# Altium PCB esp32-childboard-PCB-ERC.PcbDoc
Units mm, origin at the board's own origin, x right, y up, seen from the top; angles counter-clockwise.
Board outline 130.34 x 104.38 mm, 2 copper layers (Top Layer, Bottom Layer); 68 components, 74 nets, 260 pads, 0 vias.
Unrouted connection lines stored in the file: 99.
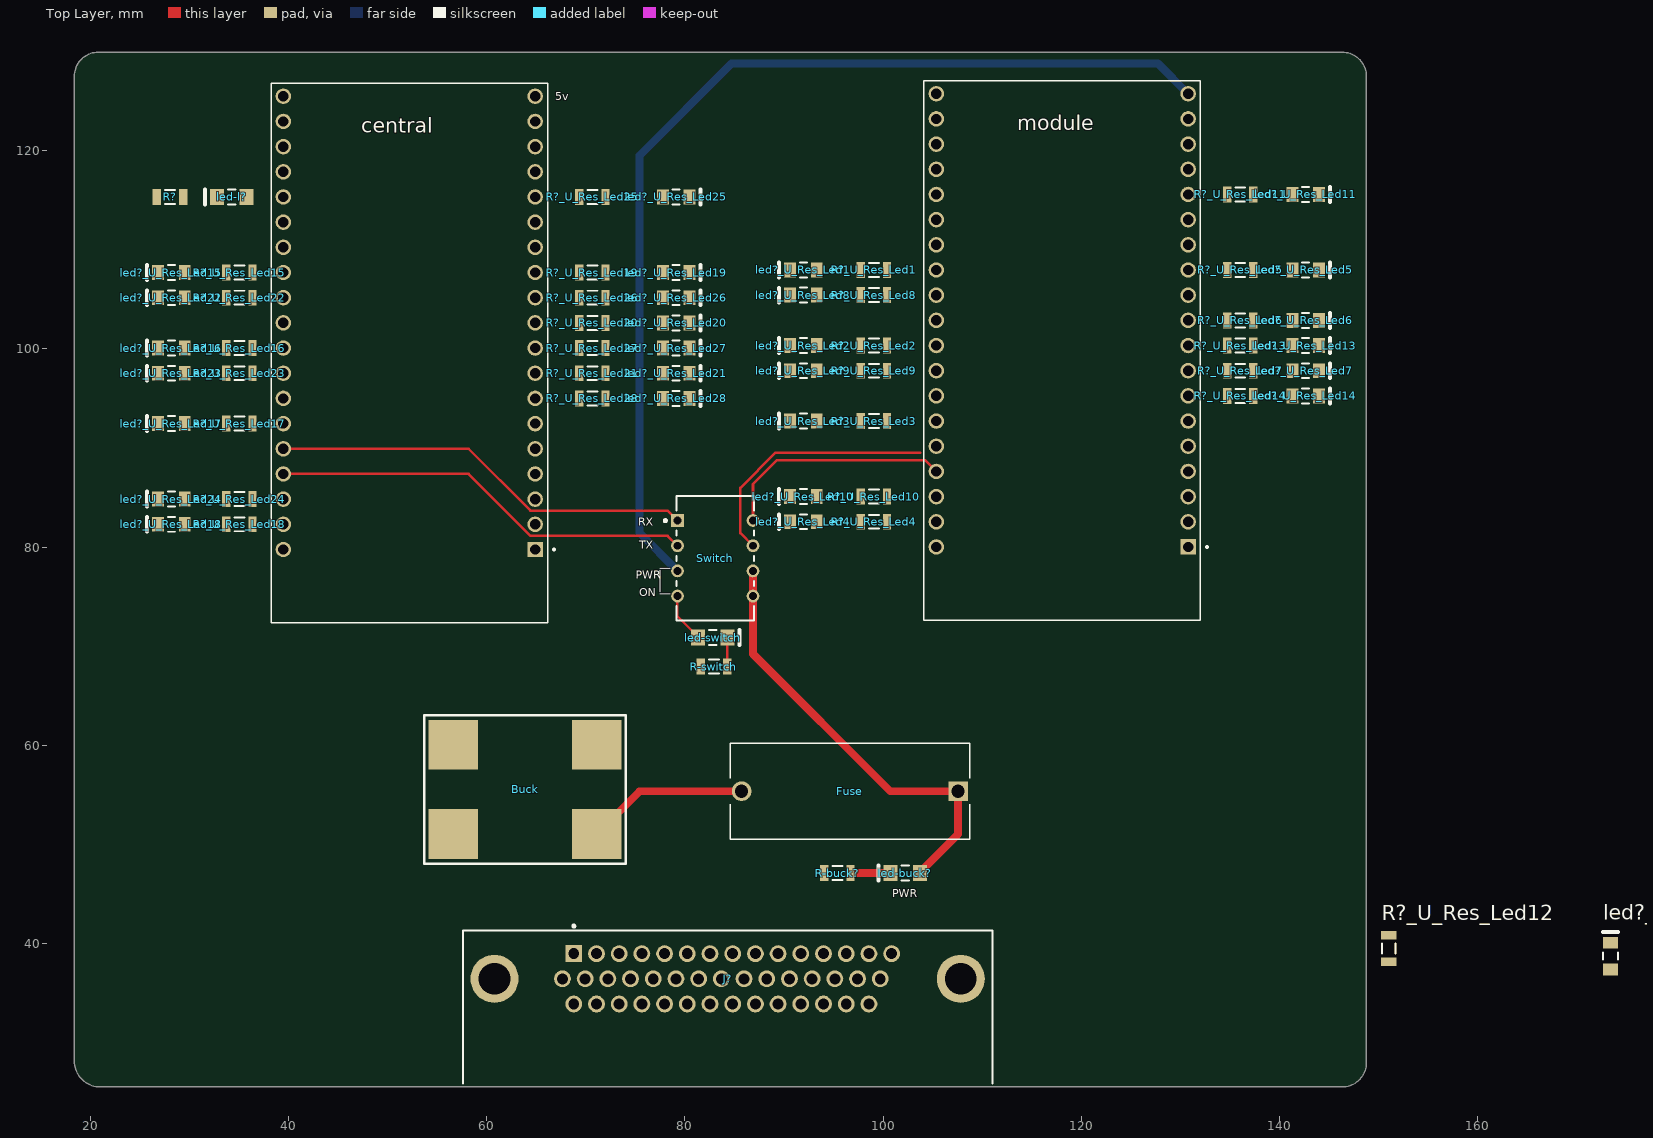
[diagram p0: Top Layer view]
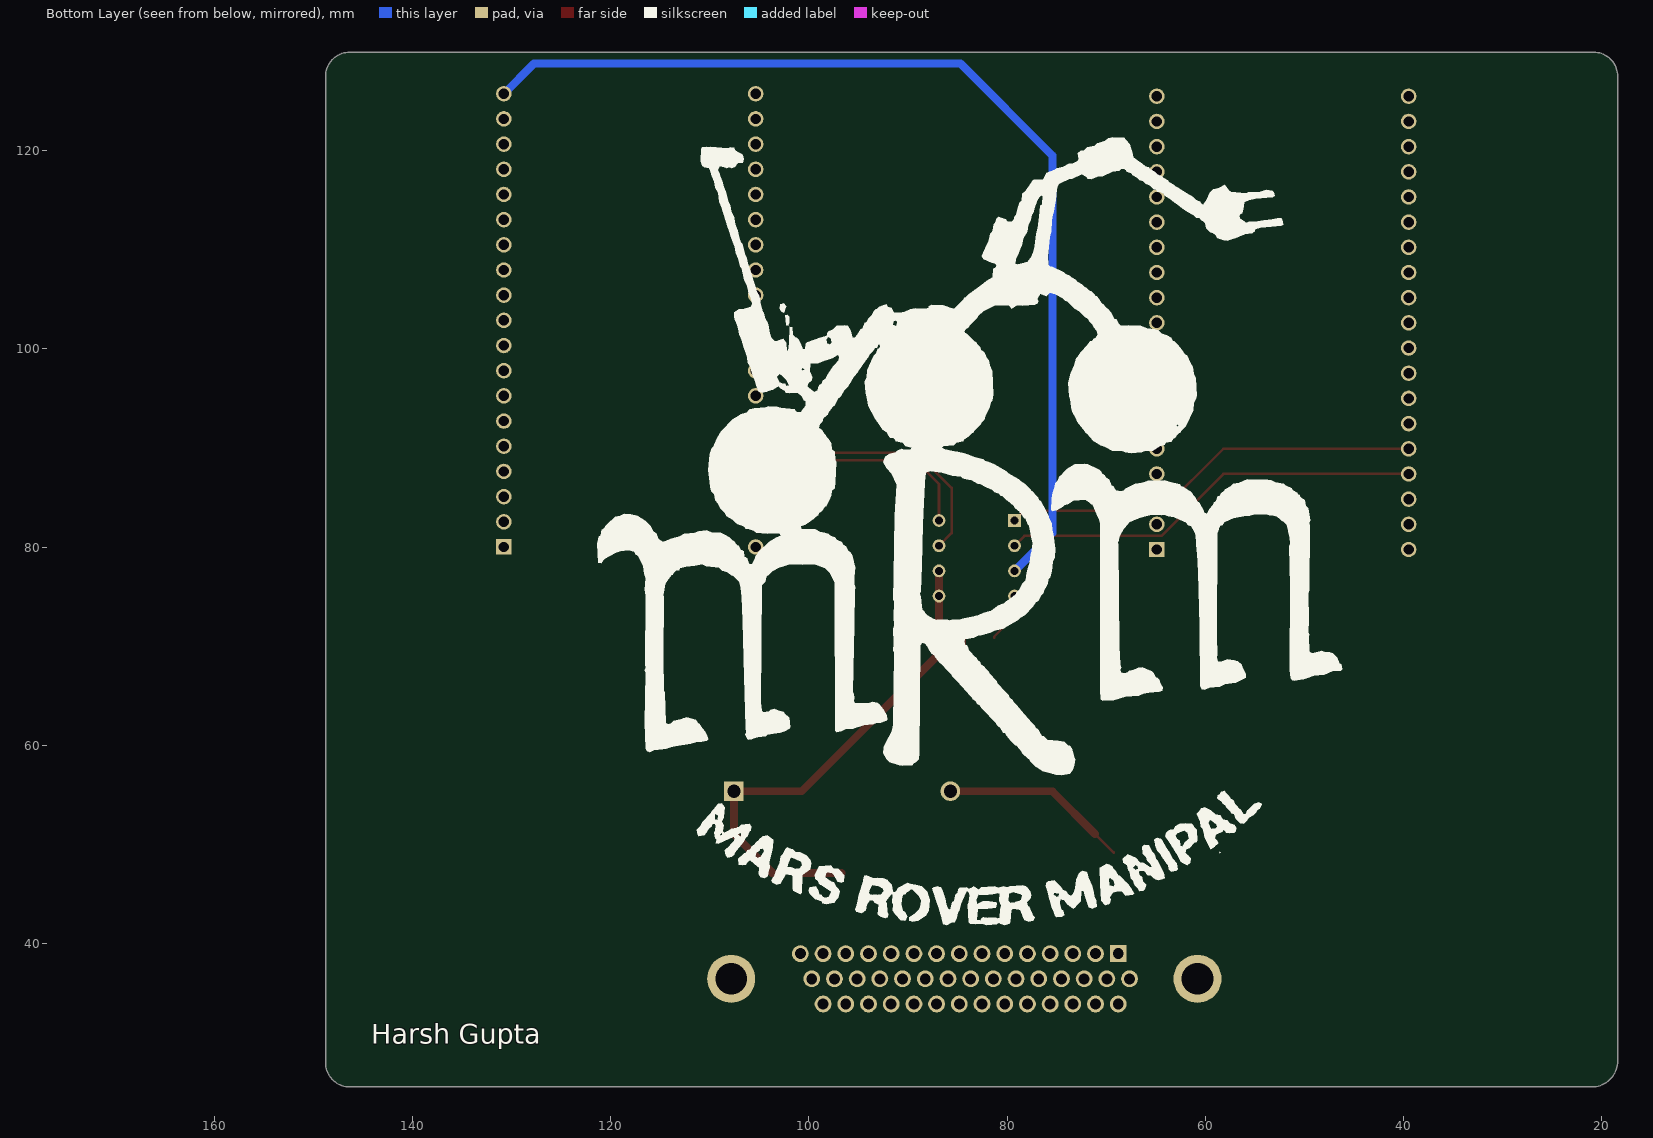
[diagram p1: Bottom Layer view, seen from below]

## Layer stack, top to bottom
Top Solder: solder mask 0.0102, Solder Resist, Dk 3.5
Top Layer: signal copper 0.009
Dielectric 1: dielectric 0.32, FR-4, Dk 4.8
Bottom Layer: signal copper 0.009
Bottom Solder: solder mask 0.0102, Solder Resist, Dk 3.5

## Board outline
18.411,28.147 18.394,127.502 18.409,127.502 cw(c20.828,127.502) 20.828,129.921 146.32,129.921 cw(c146.32,127.502) 148.738,127.502 148.738,27.961 cw(c146.32,27.961) 146.32,25.543 21.015,25.543 cw(c21.015,28.147)

## Design rules (kind name [scope] priority, off if disabled: settings)
Clearance [All] p1: gap=0.254 ignorepadtopadclearanceinfootprint=FALSE
PolygonConnect [All] p1: connectstyle=Relief reliefconductorwidth=0.254 reliefentries=4 polygonreliefangle="90 Angle" airgapwidth=0.254
RoutingVias [All] p1: holewidth=0.711 width=1.27 viastyle="Through Hole" minholewidth=0.711 minwidth=1.27 maxholewidth=0.711 maxwidth=1.27
SolderMaskExpansion [All] p1: expansion=0.102 istentingtop=FALSE
SupplyNets "Schematic Supply Nets" [InNet('GND')] p1: voltage=0.000
Width [All] p1: maxlimit=0.8 minlimit=0.254 preferedwidth=0.254
30 further rules are at their usual default settings.

## Classes and differential pairs
component class 2esp-erc-schematic: Buck Central Fuse J? led-buck? led-l? led-switch module R-buck? R-switch Switch

## Components (designator, comment, footprint, x,y, rotation, side; value= is the part's Value field where it differs from the comment)
Buck "Microbuck" "Micro buck" 63.87,55.554 r90 top
central "ESP32-DEVKITC-32D" MODULE_ESP32-DEVKITC-32D 52.197,99.516 r180 top (schematic designator Central)
Fuse "4527" FUSE_4527 96.647,55.372 r180 top
J? "L717HDB44PD1CH4F" FP-L717HDB44PD1CH4F-MFG 84.31,30.069 r0 top
led-buck? "597-3311-407F" DIAL-597-3311-407F_V 102.235,47.117 r180 top
led-l? "PG1102W-TR" STEC-1102W_V 34.29,115.316 r180 top
led-switch "597-3311-407F" DIAL-597-3311-407F_V 82.804,70.866 r0 top
led?_U_Res_Led1 "SML-LX1206YC-TR" LUMX-SML-LX1206YC-TR_V 91.948,107.95 r180 top
led?_U_Res_Led2 "SML-LX1206YC-TR" LUMX-SML-LX1206YC-TR_V 91.948,100.33 r180 top
led?_U_Res_Led3 "SML-LX1206YC-TR" LUMX-SML-LX1206YC-TR_V 91.948,92.71 r180 top
led?_U_Res_Led4 "SML-LX1206YC-TR" LUMX-SML-LX1206YC-TR_V 91.948,82.55 r180 top
led?_U_Res_Led5 "SML-LX1206YC-TR" LUMX-SML-LX1206YC-TR_V 142.621,107.95 r0 top
led?_U_Res_Led6 "SML-LX1206YC-TR" LUMX-SML-LX1206YC-TR_V 142.621,102.87 r0 top
led?_U_Res_Led7 "SML-LX1206YC-TR" LUMX-SML-LX1206YC-TR_V 142.621,97.79 r0 top
led?_U_Res_Led8 "SML-LX1206YC-TR" LUMX-SML-LX1206YC-TR_V 91.948,105.41 r180 top
led?_U_Res_Led9 "SML-LX1206YC-TR" LUMX-SML-LX1206YC-TR_V 91.948,97.79 r180 top
led?_U_Res_Led10 "SML-LX1206YC-TR" LUMX-SML-LX1206YC-TR_V 91.948,85.09 r180 top
led?_U_Res_Led11 "SML-LX1206YC-TR" LUMX-SML-LX1206YC-TR_V 142.621,115.57 r0 top
led?_U_Res_Led12 "SML-LX1206YC-TR" LUMX-SML-LX1206YC-TR_V 173.355,38.735 r90 top
led?_U_Res_Led13 "SML-LX1206YC-TR" LUMX-SML-LX1206YC-TR_V 142.621,100.33 r0 top
led?_U_Res_Led14 "SML-LX1206YC-TR" LUMX-SML-LX1206YC-TR_V 142.621,95.25 r0 top
led?_U_Res_Led15 "SML-LX1206YC-TR" LUMX-SML-LX1206YC-TR_V 28.194,107.696 r180 top
led?_U_Res_Led16 "SML-LX1206YC-TR" LUMX-SML-LX1206YC-TR_V 28.194,100.076 r180 top
led?_U_Res_Led17 "SML-LX1206YC-TR" LUMX-SML-LX1206YC-TR_V 28.194,92.456 r180 top
led?_U_Res_Led18 "SML-LX1206YC-TR" LUMX-SML-LX1206YC-TR_V 28.194,82.296 r180 top
led?_U_Res_Led19 "SML-LX1206YC-TR" LUMX-SML-LX1206YC-TR_V 79.121,107.696 r0 top
led?_U_Res_Led20 "SML-LX1206YC-TR" LUMX-SML-LX1206YC-TR_V 79.121,102.616 r0 top
led?_U_Res_Led21 "SML-LX1206YC-TR" LUMX-SML-LX1206YC-TR_V 79.121,97.536 r0 top
led?_U_Res_Led22 "SML-LX1206YC-TR" LUMX-SML-LX1206YC-TR_V 28.194,105.156 r180 top
led?_U_Res_Led23 "SML-LX1206YC-TR" LUMX-SML-LX1206YC-TR_V 28.194,97.536 r180 top
led?_U_Res_Led24 "SML-LX1206YC-TR" LUMX-SML-LX1206YC-TR_V 28.194,84.836 r180 top
led?_U_Res_Led25 "SML-LX1206YC-TR" LUMX-SML-LX1206YC-TR_V 79.121,115.316 r0 top
led?_U_Res_Led26 "SML-LX1206YC-TR" LUMX-SML-LX1206YC-TR_V 79.121,105.156 r0 top
led?_U_Res_Led27 "SML-LX1206YC-TR" LUMX-SML-LX1206YC-TR_V 79.121,100.076 r0 top
led?_U_Res_Led28 "SML-LX1206YC-TR" LUMX-SML-LX1206YC-TR_V 79.121,94.996 r0 top
module "ESP32-DEVKITC-32D" MODULE_ESP32-DEVKITC-32D 118.059,99.77 r180 top
R-buck? "RC1206FR-07120RL" RESC3116X65X40LL10T20 95.377,47.117 r180 top
R-switch "RC1206FR-07120RL" RESC3116X65X40LL10T20 82.931,67.945 r0 top
R? "RC1206FR-07120RL" RESC3116X65X40LL10T20 28.067,115.316 r0 top
R?_U_Res_Led1 "RC1206FR-07120RL" RESC3116X65X40LL10T20 99.06,107.95 r180 top
R?_U_Res_Led2 "RC1206FR-07120RL" RESC3116X65X40LL10T20 99.06,100.33 r180 top
R?_U_Res_Led3 "RC1206FR-07120RL" RESC3116X65X40LL10T20 99.06,92.71 r180 top
R?_U_Res_Led4 "RC1206FR-07120RL" RESC3116X65X40LL10T20 99.06,82.55 r180 top
R?_U_Res_Led5 "RC1206FR-07120RL" RESC3116X65X40LL10T20 136.017,107.95 r0 top
R?_U_Res_Led6 "RC1206FR-07120RL" RESC3116X65X40LL10T20 136.017,102.87 r0 top
R?_U_Res_Led7 "RC1206FR-07120RL" RESC3116X65X40LL10T20 136.017,97.79 r0 top
R?_U_Res_Led8 "RC1206FR-07120RL" RESC3116X65X40LL10T20 99.06,105.41 r180 top
R?_U_Res_Led9 "RC1206FR-07120RL" RESC3116X65X40LL10T20 99.06,97.79 r180 top
R?_U_Res_Led10 "RC1206FR-07120RL" RESC3116X65X40LL10T20 99.06,85.09 r180 top
R?_U_Res_Led11 "RC1206FR-07120RL" RESC3116X65X40LL10T20 136.017,115.57 r0 top
R?_U_Res_Led12 "RC1206FR-07120RL" RESC3116X65X40LL10T20 151.003,39.497 r90 top
R?_U_Res_Led13 "RC1206FR-07120RL" RESC3116X65X40LL10T20 136.017,100.33 r0 top
R?_U_Res_Led14 "RC1206FR-07120RL" RESC3116X65X40LL10T20 136.017,95.25 r0 top
R?_U_Res_Led15 "RC1206FR-07120RL" RESC3116X65X40LL10T20 35.052,107.696 r180 top
R?_U_Res_Led16 "RC1206FR-07120RL" RESC3116X65X40LL10T20 35.052,100.076 r180 top
R?_U_Res_Led17 "RC1206FR-07120RL" RESC3116X65X40LL10T20 35.052,92.456 r180 top
R?_U_Res_Led18 "RC1206FR-07120RL" RESC3116X65X40LL10T20 35.052,82.296 r180 top
R?_U_Res_Led19 "RC1206FR-07120RL" RESC3116X65X40LL10T20 70.667,107.696 r0 top
R?_U_Res_Led20 "RC1206FR-07120RL" RESC3116X65X40LL10T20 70.667,102.616 r0 top
R?_U_Res_Led21 "RC1206FR-07120RL" RESC3116X65X40LL10T20 70.667,97.536 r0 top
R?_U_Res_Led22 "RC1206FR-07120RL" RESC3116X65X40LL10T20 35.052,105.156 r180 top
R?_U_Res_Led23 "RC1206FR-07120RL" RESC3116X65X40LL10T20 35.052,97.536 r180 top
R?_U_Res_Led24 "RC1206FR-07120RL" RESC3116X65X40LL10T20 35.052,84.836 r180 top
R?_U_Res_Led25 "RC1206FR-07120RL" RESC3116X65X40LL10T20 70.667,115.316 r0 top
R?_U_Res_Led26 "RC1206FR-07120RL" RESC3116X65X40LL10T20 70.667,105.156 r0 top
R?_U_Res_Led27 "RC1206FR-07120RL" RESC3116X65X40LL10T20 70.667,100.076 r0 top
R?_U_Res_Led28 "RC1206FR-07120RL" RESC3116X65X40LL10T20 70.667,94.996 r0 top
Switch "1825360-3" FP-1825360-3-MFG 83.058,78.867 r270 top

## Footprints (in the part's own frame and the unit in brackets; to place one, negate y for a bottom-side part, rotate by r counter-clockwise, add the part's x,y. Pads: shape width x height; smd on the part's side, far side on the other; paste and mask are expansions set on the pad)
DIAL-597-3311-407F_V [mm] "SMD, 2-Leads, Body 1.5x3mm"
  rect 1.42x1.6 smd: 1(-1.49,0) 2(1.49,0)
  silkscreen extent -0.38,-0.75 2.7,0.75, body extent -1.5,-0.75 1.5,0.75, height 1.5
FP-1825360-3-MFG [mm]
  rect 1.29x1.29 hole 0.79 paste-2539.97 mask+0: 1(-3.81,-3.81)
  round 1.29 hole 0.79 paste-2539.97 mask+0: 2(-1.27,-3.81) 3(1.27,-3.81) 4(3.81,-3.81) 5(3.81,3.81) 6(1.27,3.81) 7(-1.27,3.81) 8(-3.81,3.81)
  silkscreen extent -6.29,-5.16 6.29,3.9, body extent -6.4,-4.55 6.4,4.55, height 0.25
FP-L717HDB44PD1CH4F-MFG [mm]
  rect 1.7x1.7 hole 1.1 paste-2539.97 mask+0: 1(-15.52,8.92)
  round 1.7 hole 1.1 paste-2539.97 mask+0: 2(-13.23,8.92) 3(-10.94,8.92) 4(-8.65,8.92) 5(-6.36,8.92) 6(-4.07,8.92) 7(-1.78,8.92) 8(0.51,8.92) 9(2.8,8.92) 10(5.09,8.92) 11(7.38,8.92) 12(9.67,8.92) 13(11.96,8.92) 14(14.25,8.92) 15(16.54,8.92) 16(-16.665,6.38) 17(-14.375,6.38) 18(-12.085,6.38) 19(-9.795,6.38) 20(-7.505,6.38) 21(-5.215,6.38) 22(-2.925,6.38) 23(-0.635,6.38) 24(1.655,6.38) 25(3.945,6.38) 26(6.235,6.38) 27(8.525,6.38) 28(10.815,6.38) 29(13.105,6.38) 30(15.395,6.38) 31(-15.52,3.84) 32(-13.23,3.84) 33(-10.94,3.84) 34(-8.65,3.84) 35(-6.36,3.84) 36(-4.07,3.84) 37(-1.78,3.84) 38(0.51,3.84) 39(2.8,3.84) 40(5.09,3.84) 41(7.38,3.84) 42(9.67,3.84) 43(11.96,3.84) 44(14.25,3.84)
  round 4.85 hole 3.2 paste-2539.97 mask+0: 45(-23.52,6.38) 46(23.52,6.38)
  silkscreen extent -26.71,-4.2 26.71,11.82, body extent -26.81,-11.34 26.81,11.34, height 0.25
FUSE_4527 [mm]
  rect 1.98x1.98 hole 1.32: 1(-10.92,0)
  round 1.98 hole 1.32: 2(10.92,0)
  silkscreen extent -12.08,-4.85 12.08,4.85
LUMX-SML-LX1206YC-TR_V [mm] "SMD, 2-Leads, Body 3.2x1.5mm"
  rect 1.2x1.5 smd: 1(-1.35,0) 2(1.35,0)
  silkscreen extent -0.35,-0.75 2.45,0.75, body extent -1.6,-0.75 1.6,0.75, height 1.25
"Micro buck" [mm]
  rect 5x5 smd: 1(-4.5,7.25) 2(4.5,7.25) 3(-4.5,-7.25) 4(4.5,-7.25)
  silkscreen extent -7.5,-10.16 7.5,10.16
MODULE_ESP32-DEVKITC-32D [mm]
  rect 1.56x1.56 / inner round 1.56 / far side rect 1.56x1.56 hole 1.04: J2-1(-12.7,19.76)
  round 1.56 hole 1.04: J2-2(-12.7,17.22) J2-3(-12.7,14.68) J2-4(-12.7,12.14) J2-5(-12.7,9.6) J2-6(-12.7,7.06) J2-7(-12.7,4.52) J2-8(-12.7,1.98) J2-9(-12.7,-0.56) J2-10(-12.7,-3.1) J2-11(-12.7,-5.64) J2-12(-12.7,-8.18) J2-13(-12.7,-10.72) J2-14(-12.7,-13.26) J2-15(-12.7,-15.8) J2-16(-12.7,-18.34) J2-17(-12.7,-20.88) J2-18(-12.7,-23.42) J2-19(-12.7,-25.96) J3-1(12.7,19.76) J3-2(12.7,17.22) J3-3(12.7,14.68) J3-4(12.7,12.14) J3-5(12.7,9.6) J3-6(12.7,7.06) J3-7(12.7,4.52) J3-8(12.7,1.98) J3-9(12.7,-0.56) J3-10(12.7,-3.1) J3-11(12.7,-5.64) J3-12(12.7,-8.18) J3-13(12.7,-10.72) J3-14(12.7,-13.26) J3-15(12.7,-15.8) J3-16(12.7,-18.34) J3-17(12.7,-20.88) J3-18(12.7,-23.42) J3-19(12.7,-25.96)
  silkscreen extent -14.7,-27.25 13.95,27.15, body extent -13.97,-27.9 13.97,27.2, height 6.69
RESC3116X65X40LL10T20 [mm] "Chip Resistor, 2-Leads, Body 3.10x1.60mm, IPC High Density"
  rect 0.85x1.6 smd: 1(-1.325,0) 2(1.325,0)
  silkscreen extent -0.5,-0.7 0.5,0.7, body extent -1.6,-0.85 1.6,0.85, height 0.65
STEC-1102W_V [mm] "SMD, 2-Leads, Body 3x1.5mm"
  rect 1.4x1.6 smd: 1(-1.5,0) 2(1.5,0)
  silkscreen extent -0.4,-0.75 2.7,0.75, body extent -1.5,-0.75 1.5,0.75, height 1.78

## Part data
Buck: library part microbuck
central module: "WiFi Development Tools (802.11) ESP32 General Development Kit, ESP32-WROOM-32D on the board", Package=None, Check_prices=https://www.snapeda.com/parts/ESP32-DEVKITC-32D/Espressif+Systems/view-part/?ref=eda, MF="Espressif Systems", MP=ESP32-DEVKITC-32D, SnapEDA_Link=https://www.snapeda.com/parts/ESP32-DEVKITC-32D/Espressif+Systems/view-part/?ref=snap
Fuse: "Fuseholder; 5 A; 250 V; Nylon; Base only; Brass, Tin Plate (Contact)", Package=None, Availability=Unavailable, MP=4527, Price=None
J?: library part CMP-02362-000001-1, "CONN DSUB HD PLUG 44POS R/A SLDR", Current Rating=3A, Max Operating Temperature=105°C, Min Operating Temperature=-55°C, Package Quantity=50, Voltage Rating=250V, Body Material=Steel, Connector Type=D-Sub, Contact Material=Brass, Contact Plating=Gold, Depth=22.22mm, Gender=Male, Housing Material=Thermoplastic, Length=53.09mm, Mount="Through Hole", Number of Contacts=44, Number of Ports=1, Number of Positions=44, Number of Rows=3, Number of Terminals=44, Orientation="Right Angle", Packaging=Tray, Termination=Solder, Width=12.55mm
led-buck? led-switch: library part CMP-2000-05651-1, "LED Green, 75 mW, 30 mA, -30 to 85 degC, 2-Pin SMD, RoHS, Tape and Reel", Emitting Color=YellowGreen, Forward Current=30mA, Forward Voltage=2.5V, Manufacturer=Dialight, Operating Temp Range=-30Cto85C, Operating Temperature Classification=Commercial, Package Description="2-Pin Surface Mount Device, Body 1.5 x 3 mm", Package Type=SMD, Power Dissipation=75W, Reverse Voltage=4V, Test Current (It)=20mA, Chip Material=GaP, Datasheet URL=https://datasheet.ciiva.com/15117/getdatasheetpartid-142484-15117764.pdf, Datasheet Version=07/2002, DELETED=Compliant, High Brightness=No, Lens Dimensions=2x1.5x0.9mm, Lens Type=NonDiffused, Lum Intensity=7.5mcd, Luminous Intensity=7.5mcd, Main Category=ChipLED, Manufacturer URL=http://www.dialight.com/, Mounting=SurfaceMount, Mounting Technology=SurfaceMount, Number of  Elements=1, Package Reference=597-3311-407F, Packaging=TapeandReel, Peak Wavelength=560nm, Pin Count=2, Product Depth (mm)=1.5mm, Product Height (mm)=1.5mm, Product Length (mm)=3mm, Rad Hardened=No, Shape Type=Rectangular, Type=Uni-Color, Viewing Angle=70deg
led-l?: library part CMP-2000-06890-1, "Green LED, 567 nm, 2.1 V, 30 mA, -30 to 85 degC, 2-Pin SMD, RoHS, Tape and Reel", Emitting Color=YellowGreen, Forward Current=30mA, Forward Voltage=2.5V, Manufacturer="Stanley Electric", Operating Temp Range=-30Cto85C, Operating Temperature Classification=Commercial, Package Description="2-Pin Surface Mounted Device , Body 3 x 1.5 mm", Package Reference=1102W, Package Type=SMD, Power Dissipation=75W, Reverse Voltage=4V, Test Current (It)=20mA, Chip Material=GaP, Datasheet URL=http://media.digikey.com/pdf/Data%20Sheets/Stanley%20Electric%20PDFs/1102W_Series.pdf, Datasheet Version=08/2007, DELETED=Compliant, Dominant Wave Length=567nm, High Brightness=No, Lens Dimensions=2x1.5x0.9mm, Lum Intensity=12mcd, Luminous Intensity=12mcd, Main Category=ChipLED, Manufacturer URL=http://www.stanley-electric.com/, Mounting=SurfaceMount, Mounting Technology=SurfaceMount, Number of  Elements=1, Packaging=TapeandReel, Peak Wavelength=560nm, Pin Count=2, Product Depth (mm)=1.5mm, Product Height (mm)=1.5mm, Product Length (mm)=3mm, Rad Hardened=No, Shape Type=Rectangular, Type=Uni-Color, Viewing Angle=69/85deg
led?_U_Res_Led1 led?_U_Res_Led2 led?_U_Res_Led3 led?_U_Res_Led4 led?_U_Res_Led5 led?_U_Res_Led6 led?_U_Res_Led7 led?_U_Res_Led8 led?_U_Res_Led9 led?_U_Res_Led10 led?_U_Res_Led11 led?_U_Res_Led12 led?_U_Res_Led13 led?_U_Res_Led14 led?_U_Res_Led15 led?_U_Res_Led16 led?_U_Res_Led17 led?_U_Res_Led18 led?_U_Res_Led19 led?_U_Res_Led20 led?_U_Res_Led21 led?_U_Res_Led22 led?_U_Res_Led23 led?_U_Res_Led24 led?_U_Res_Led25 led?_U_Res_Led26 led?_U_Res_Led27 led?_U_Res_Led28: library part CMP-2000-07124-1, "Yellow LED, Water Clear Len, 585 nm, 2.1 V, -40 to 85 degC, 2-Pin SMD, RoHS, Tape and Reel", Color=Yellow, Current - Test=20mA, Lens Color=Colorless, Manufacturer=Lumex, Millicandela Rating=6mcd, Package / Case=1206(3216Metric), Package Description="2-Pin Surface Mount Device, Body 3.2 x 1.5 mm", Standard Package=3,000, Supplier Device Package=1206, Voltage - Forward (Vf) (Typ)=2.1V, Catalog Drawings=SML-LX1206SeriesTopSML-LX1206SeriesSideSML-LX1206SeriesBottomSML-LX1206SeriesFootprint, Category=Optoelectronics, Datasheet URL=http://www.lumex.com/content/files/ProductAttachment/SML-LX1206YC-TR.pdf, Datasheet Version="Rev. K, 08/2012", Family=LEDIndication-Discrete, Features=-, Height (Max)=1.10mm, Lens Style/Size=RectanglewithFlatTop, Lens Transparency=Clear, Manufacturer URL=http://www.lumexinstruments.com/, Mounting Technology=SurfaceMount, Mounting Type=SurfaceMount, Online Catalog=SML-LX1206RectanglewithFlatTop1206PackageLEDs, Other Names=67-1358-2LU60357TRSMLLX1206YCTR, Package Reference=SML-LX1206YC-TR, Packaging=Tape&Reel(TR), Product Training Modules=LEDsBenefitsofCustomLEDandLCDTechnology, RoHS Information=RoHSCertofCompliance, Series=-, Size / Dimension=3.20mmLx1.60mmW, Viewing Angle=160°, Wavelength - Dominant=-, Wavelength - Peak=585nm
R-buck? R-switch R? R?_U_Res_Led1 R?_U_Res_Led2 R?_U_Res_Led3 R?_U_Res_Led4 R?_U_Res_Led5 R?_U_Res_Led6 R?_U_Res_Led7 R?_U_Res_Led8 R?_U_Res_Led9 R?_U_Res_Led10 R?_U_Res_Led11 R?_U_Res_Led12 R?_U_Res_Led13 R?_U_Res_Led14 R?_U_Res_Led15 R?_U_Res_Led16 R?_U_Res_Led17 R?_U_Res_Led18 R?_U_Res_Led19 R?_U_Res_Led20 R?_U_Res_Led21 R?_U_Res_Led22 R?_U_Res_Led23 R?_U_Res_Led24 R?_U_Res_Led25 R?_U_Res_Led26 R?_U_Res_Led27 R?_U_Res_Led28: library part CMP-2000-06965-1, "Chip Resistor, 120 Ohm, +/- 1%, 250 mW, -55 to 155 degC, 1206 (3216 Metric), RoHS, Tape and Reel", Manufacturer=Yageo, Package Description="2-Pin Surface Mount Device, Body 3.1 x 1.6 mm", Package Reference=1206, Power Rating=250mW, Resistance=120ohm, Resistance Tolerance=±1%, Resistor Case Style=1206[3216Metric], Resistor Element Type=ThickFilm, Temperature Coefficient=±100ppm/°C, Voltage Rating=200V, Datasheet URL=http://www.yageo.com/documents/recent/PYu-RC_Group_51_RoHS_L_7.pdf, Datasheet Version="Rev. 7, 05/2017", Manufacturer URL=http://www.yageo.com/, Mounting Technology=SurfaceMount, MSL=MSL1-Unlimited, Packaging=CutTape, Product Range=RCSeries, SVHC=ToBeAdvised
Switch: library part CMP-03400-000022-1, "SWITCH SLIDE DIP SPST 100MA 24V", Contact Current Rating=1A, Contact Resistance=50mR, Flammability Rating="UL94 V-0", Housing Color=Black, Max Current Rating=100mA, Max Operating Temperature=85°C, Max Voltage Rating (DC)=24V, Min Operating Temperature=-30°C, Package Quantity=35, Voltage Rating (DC)=5V, Actuator Length=0.99mm, Actuator Material=Polybutylene, Actuator Type=Standard, Contact Material="Copper Alloy", Contact Plating=Gold, Contact Post Length=4mm, Depth=7.49mm, Electrical Life=1000Cycles, ELV=Compliant, Height=0.138inch, Housing Material=Polyphenylene, Lead Free="Lead Free", Length=0.476inch, Mount="Through Hole", Number of Circuits=4, Number of Positions=4, Orientation=Straight, Packaging=Rail/Tube, Pitch=0.1inch, Radiation Hardening=No, RoHS Compliant=Yes, Sealable="No (Without)", Series=ADE, Terminal Pitch=2.54mm, Termination="PC Pins", Throw Configuration=SPST, Type=Switch, Washable=Yes

## Nets (pads, with @x,y where several pads share a name; then routed paths per layer and width w, separated by ;. In a path a pad name is that pad's centre, name@x,y a point inside that pad or via, vN(x,y) a via of type N, cw(c..) or ccw(c..) an arc to the next point about the centre after c; other vN are vias at no path point)
GND: Buck.2 Buck.4 central.J2-14 central.J3-1 central.J3-7 led?_U_Res_Led1.2 led?_U_Res_Led2.2 led?_U_Res_Led3.2 led?_U_Res_Led4.2 led?_U_Res_Led5.2 led?_U_Res_Led6.2 led?_U_Res_Led7.2 led?_U_Res_Led8.2 led?_U_Res_Led9.2 led?_U_Res_Led10.2 led?_U_Res_Led11.2 led?_U_Res_Led12.2 led?_U_Res_Led13.2 led?_U_Res_Led14.2 led?_U_Res_Led15.2 led?_U_Res_Led16.2 led?_U_Res_Led17.2 led?_U_Res_Led18.2 led?_U_Res_Led19.2 led?_U_Res_Led20.2 led?_U_Res_Led21.2 led?_U_Res_Led22.2 led?_U_Res_Led23.2 led?_U_Res_Led24.2 led?_U_Res_Led25.2 led?_U_Res_Led26.2 led?_U_Res_Led27.2 led?_U_Res_Led28.2 module.J2-14 module.J3-1 module.J3-7 R-buck?.2 R-switch.1 R?.1
NetBuck_1: Buck.1
NetBuck_3: Buck.3 Fuse.2 | length 19
  Top Layer w0.254: Buck.3@69.256,49.19 Buck.3
  Top Layer w0.8: Buck.3 75.438,55.372 Fuse.2
NetCentral_J2-5: central.J2-5
NetCentral_J2-6: central.J2-6
NetCentral_J2-7: central.J2-7 R?_U_Res_Led28.1
NetCentral_J2-8: central.J2-8 R?_U_Res_Led21.1
NetCentral_J2-9: central.J2-9 R?_U_Res_Led27.1
NetCentral_J2-10: central.J2-10 R?_U_Res_Led20.1
NetCentral_J2-11: central.J2-11 R?_U_Res_Led26.1 | length 0.3
  Top Layer w0.254: central.J2-11 central.J2-11@65.087,104.966
NetCentral_J2-12: central.J2-12 R?_U_Res_Led19.1
NetCentral_J2-15: central.J2-15 R?_U_Res_Led25.1
NetCentral_J2-19: central.J2-19 Fuse.1 led-buck?.1 module.J2-19 Switch.3 Switch.5 Switch.6 | length 148.6
  Top Layer w0.8: Switch.6 Switch.5 86.868,69.215 100.711,55.372 Fuse.1 107.567,51.049 103.725,47.207 led-buck?.1
  Bottom Layer w0.8: Switch.3 75.438,81.407 75.438,119.507 84.709,128.778 127.711,128.778 module.J2-19
NetCentral_J3-2: central.J3-2 R?_U_Res_Led18.1
NetCentral_J3-3: central.J3-3 R?_U_Res_Led24.1 | length 0.3
  Top Layer w0.254: central.J3-3@39.206,84.836 central.J3-3
NetCentral_J3-4: central.J3-4 Switch.2 | length 42.7
  Top Layer w0.254: central.J3-4 58.175,87.376 64.416,81.135 78.25,81.135 Switch.2
NetCentral_J3-5: central.J3-5 Switch.1 | length 42.7
  Top Layer w0.254: central.J3-5 58.175,89.916 64.416,83.675 78.25,83.675 Switch.1
NetCentral_J3-6: central.J3-6 R?_U_Res_Led17.1
NetCentral_J3-8: central.J3-8 R?_U_Res_Led23.1
NetCentral_J3-9: central.J3-9 R?_U_Res_Led16.1
NetCentral_J3-11: central.J3-11 R?_U_Res_Led22.1
NetCentral_J3-12: central.J3-12 R?_U_Res_Led15.1
NetCentral_J3-14: central.J3-14
NetCentral_J3-15: central.J3-15 led-l?.1
Netled-buck?_2: led-buck?.2 R-buck?.1 | length 4
  Top Layer w0.8: R-buck?.1 led-buck?.2
Netled-l?_2: led-l?.2 R?.2
Netled-switch_1: led-switch.1 Switch.4 | length 5
  Top Layer w0.254: Switch.4 79.248,73.022 81.314,70.956 led-switch.1
Netled-switch_2: led-switch.2 R-switch.2 | length 2.9
  Top Layer w0.254: R-switch.2 84.294,67.983 led-switch.2
Netled?_U_Res_Led1_1: led?_U_Res_Led1.1 R?_U_Res_Led1.2
Netled?_U_Res_Led2_1: led?_U_Res_Led2.1 R?_U_Res_Led2.2
Netled?_U_Res_Led3_1: led?_U_Res_Led3.1 R?_U_Res_Led3.2
Netled?_U_Res_Led4_1: led?_U_Res_Led4.1 R?_U_Res_Led4.2
Netled?_U_Res_Led5_1: led?_U_Res_Led5.1 R?_U_Res_Led5.2
Netled?_U_Res_Led6_1: led?_U_Res_Led6.1 R?_U_Res_Led6.2
Netled?_U_Res_Led7_1: led?_U_Res_Led7.1 R?_U_Res_Led7.2
Netled?_U_Res_Led8_1: led?_U_Res_Led8.1 R?_U_Res_Led8.2
Netled?_U_Res_Led9_1: led?_U_Res_Led9.1 R?_U_Res_Led9.2
Netled?_U_Res_Led10_1: led?_U_Res_Led10.1 R?_U_Res_Led10.2
Netled?_U_Res_Led11_1: led?_U_Res_Led11.1 R?_U_Res_Led11.2
Netled?_U_Res_Led12_1: led?_U_Res_Led12.1 R?_U_Res_Led12.2
Netled?_U_Res_Led13_1: led?_U_Res_Led13.1 R?_U_Res_Led13.2
Netled?_U_Res_Led14_1: led?_U_Res_Led14.1 R?_U_Res_Led14.2
Netled?_U_Res_Led15_1: led?_U_Res_Led15.1 R?_U_Res_Led15.2
Netled?_U_Res_Led16_1: led?_U_Res_Led16.1 R?_U_Res_Led16.2
Netled?_U_Res_Led17_1: led?_U_Res_Led17.1 R?_U_Res_Led17.2
Netled?_U_Res_Led18_1: led?_U_Res_Led18.1 R?_U_Res_Led18.2
Netled?_U_Res_Led19_1: led?_U_Res_Led19.1 R?_U_Res_Led19.2
Netled?_U_Res_Led20_1: led?_U_Res_Led20.1 R?_U_Res_Led20.2
Netled?_U_Res_Led21_1: led?_U_Res_Led21.1 R?_U_Res_Led21.2
Netled?_U_Res_Led22_1: led?_U_Res_Led22.1 R?_U_Res_Led22.2
Netled?_U_Res_Led23_1: led?_U_Res_Led23.1 R?_U_Res_Led23.2
Netled?_U_Res_Led24_1: led?_U_Res_Led24.1 R?_U_Res_Led24.2
Netled?_U_Res_Led25_1: led?_U_Res_Led25.1 R?_U_Res_Led25.2
Netled?_U_Res_Led26_1: led?_U_Res_Led26.1 R?_U_Res_Led26.2
Netled?_U_Res_Led27_1: led?_U_Res_Led27.1 R?_U_Res_Led27.2
Netled?_U_Res_Led28_1: led?_U_Res_Led28.1 R?_U_Res_Led28.2
Netmodule_J2-5: module.J2-5
Netmodule_J2-6: module.J2-6
Netmodule_J2-7: module.J2-7 R?_U_Res_Led14.1
Netmodule_J2-8: module.J2-8 R?_U_Res_Led7.1
Netmodule_J2-9: module.J2-9 R?_U_Res_Led13.1
Netmodule_J2-10: module.J2-10 R?_U_Res_Led6.1
Netmodule_J2-11: module.J2-11 R?_U_Res_Led12.1
Netmodule_J2-12: module.J2-12 R?_U_Res_Led5.1
Netmodule_J2-15: module.J2-15 R?_U_Res_Led11.1
Netmodule_J3-2: module.J3-2 R?_U_Res_Led4.1
Netmodule_J3-3: module.J3-3 R?_U_Res_Led10.1
Netmodule_J3-4: module.J3-4 Switch.8 | length 23.6
  Top Layer w0.254: Switch.8 86.868,86.36 89.281,88.773 104.216,88.773 module.J3-4
Netmodule_J3-5: module.J3-5 Switch.7 | length 26
  Top Layer w0.254: Switch.7 85.598,81.407 85.598,85.979 89.154,89.535 103.759,89.535
Netmodule_J3-6: module.J3-6 R?_U_Res_Led3.1
Netmodule_J3-8: module.J3-8 R?_U_Res_Led9.1
Netmodule_J3-9: module.J3-9 R?_U_Res_Led2.1
Netmodule_J3-11: module.J3-11 R?_U_Res_Led8.1
Netmodule_J3-12: module.J3-12 R?_U_Res_Led1.1
pads on no net: central.J2-1 central.J2-2 central.J2-3 central.J2-4 central.J2-13 central.J2-16 central.J2-17 central.J2-18 central.J3-10 central.J3-13 central.J3-16 central.J3-17 central.J3-18 central.J3-19 J?.1 J?.2 J?.3 J?.4 J?.5 J?.6 J?.7 J?.8 J?.9 J?.10 J?.11 J?.12 J?.13 J?.14 J?.15 J?.16 J?.17 J?.18 J?.19 J?.20 J?.21 J?.22 J?.23 J?.24 J?.25 J?.26 J?.27 J?.28 J?.29 J?.30 J?.31 J?.32 J?.33 J?.34 J?.35 J?.36 J?.37 J?.38 J?.39 J?.40 J?.41 J?.42 J?.43 J?.44 J?.45 J?.46 module.J2-1 module.J2-2 module.J2-3 module.J2-4 module.J2-13 module.J2-16 module.J2-17 module.J2-18 module.J3-10 module.J3-13 module.J3-14 module.J3-15 module.J3-16 module.J3-17 module.J3-18 module.J3-19

## Silkscreen, mask and mechanical layers (free items; w line width, h text height)
Top Overlay:
  text "5v" at 66.902,125.068 h0.8
  text "RX" at 75.284,82.142 h0.8
  text "TX" at 75.411,79.856 h0.8
  text "|____|" at 77.703,78.005 h0.8 r270
  text "PWR" at 75.03,76.808 h0.8
  text "ON" at 75.411,75.03 h0.8
  text "PWR" at 100.938,44.677 h0.8
Bottom Overlay:
  drawing of 18 lines, arcs and shapes, not listed
  text "Harsh Gupta" at 144.145,29.876 h2
Mechanical 1:
  lines w0.254: 18.394,127.502 18.411,28.147 ccw(c21.015,28.147) 21.015,25.543 146.32,25.543 ccw(c146.32,27.961) 148.738,27.961 148.738,127.502 ccw(c146.32,127.502) 146.32,129.921 20.828,129.921 ccw(c20.828,127.502) 18.409,127.502